# Altium PCB 660-LDBU01-CELLS.PcbDoc
Units mm, origin at the board's own origin, x right, y up, seen from the top; angles counter-clockwise.
Board outline 151.26 x 162.69 mm, 4 copper layers (Top Layer, MidLayer1, MidLayer2, Bottom Layer); 8 components, 0 nets, 6 pads, 0 vias.
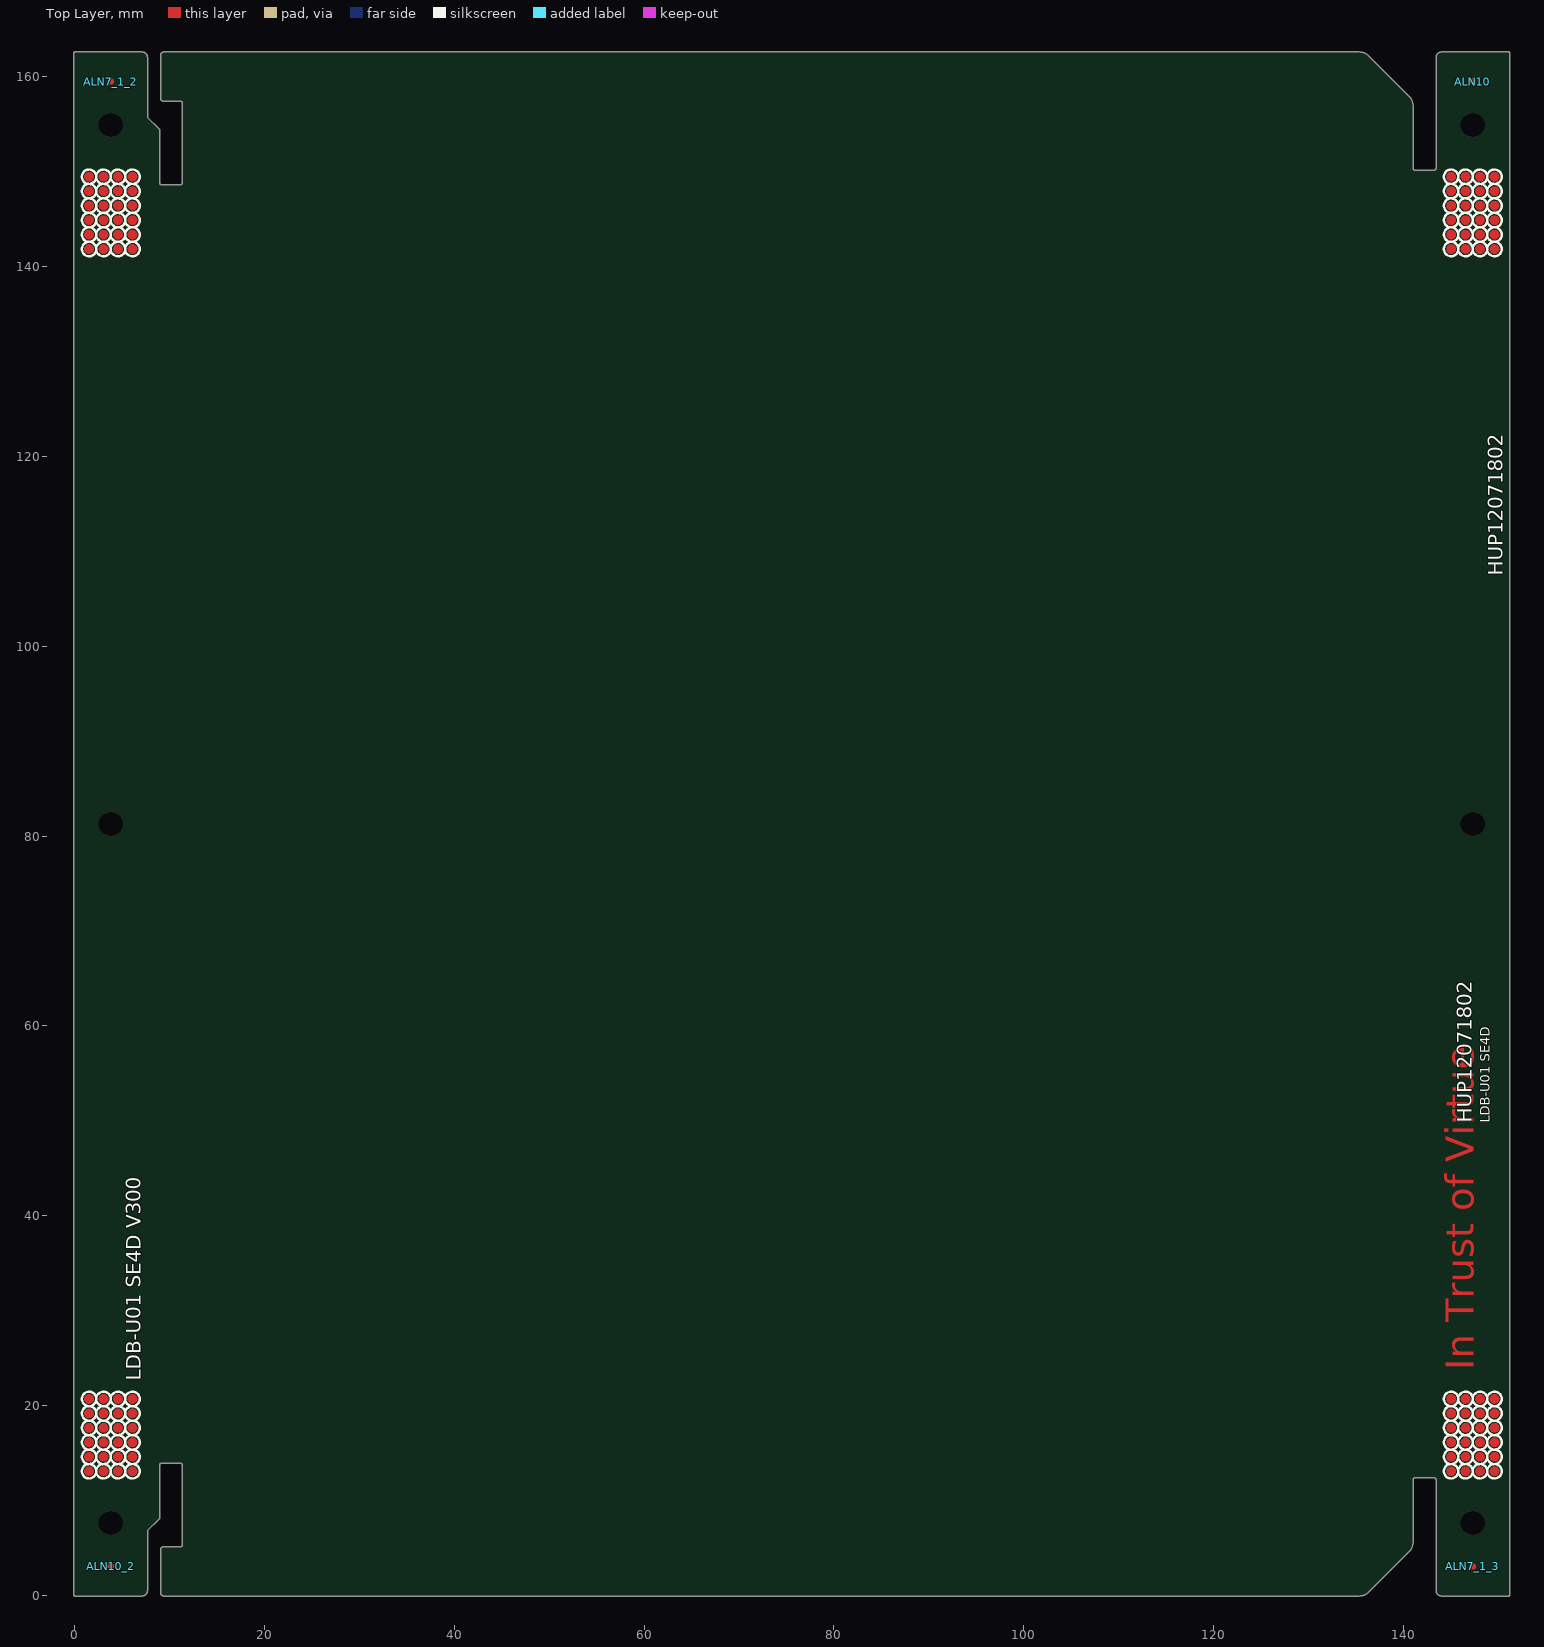
[diagram p0: Top Layer view]
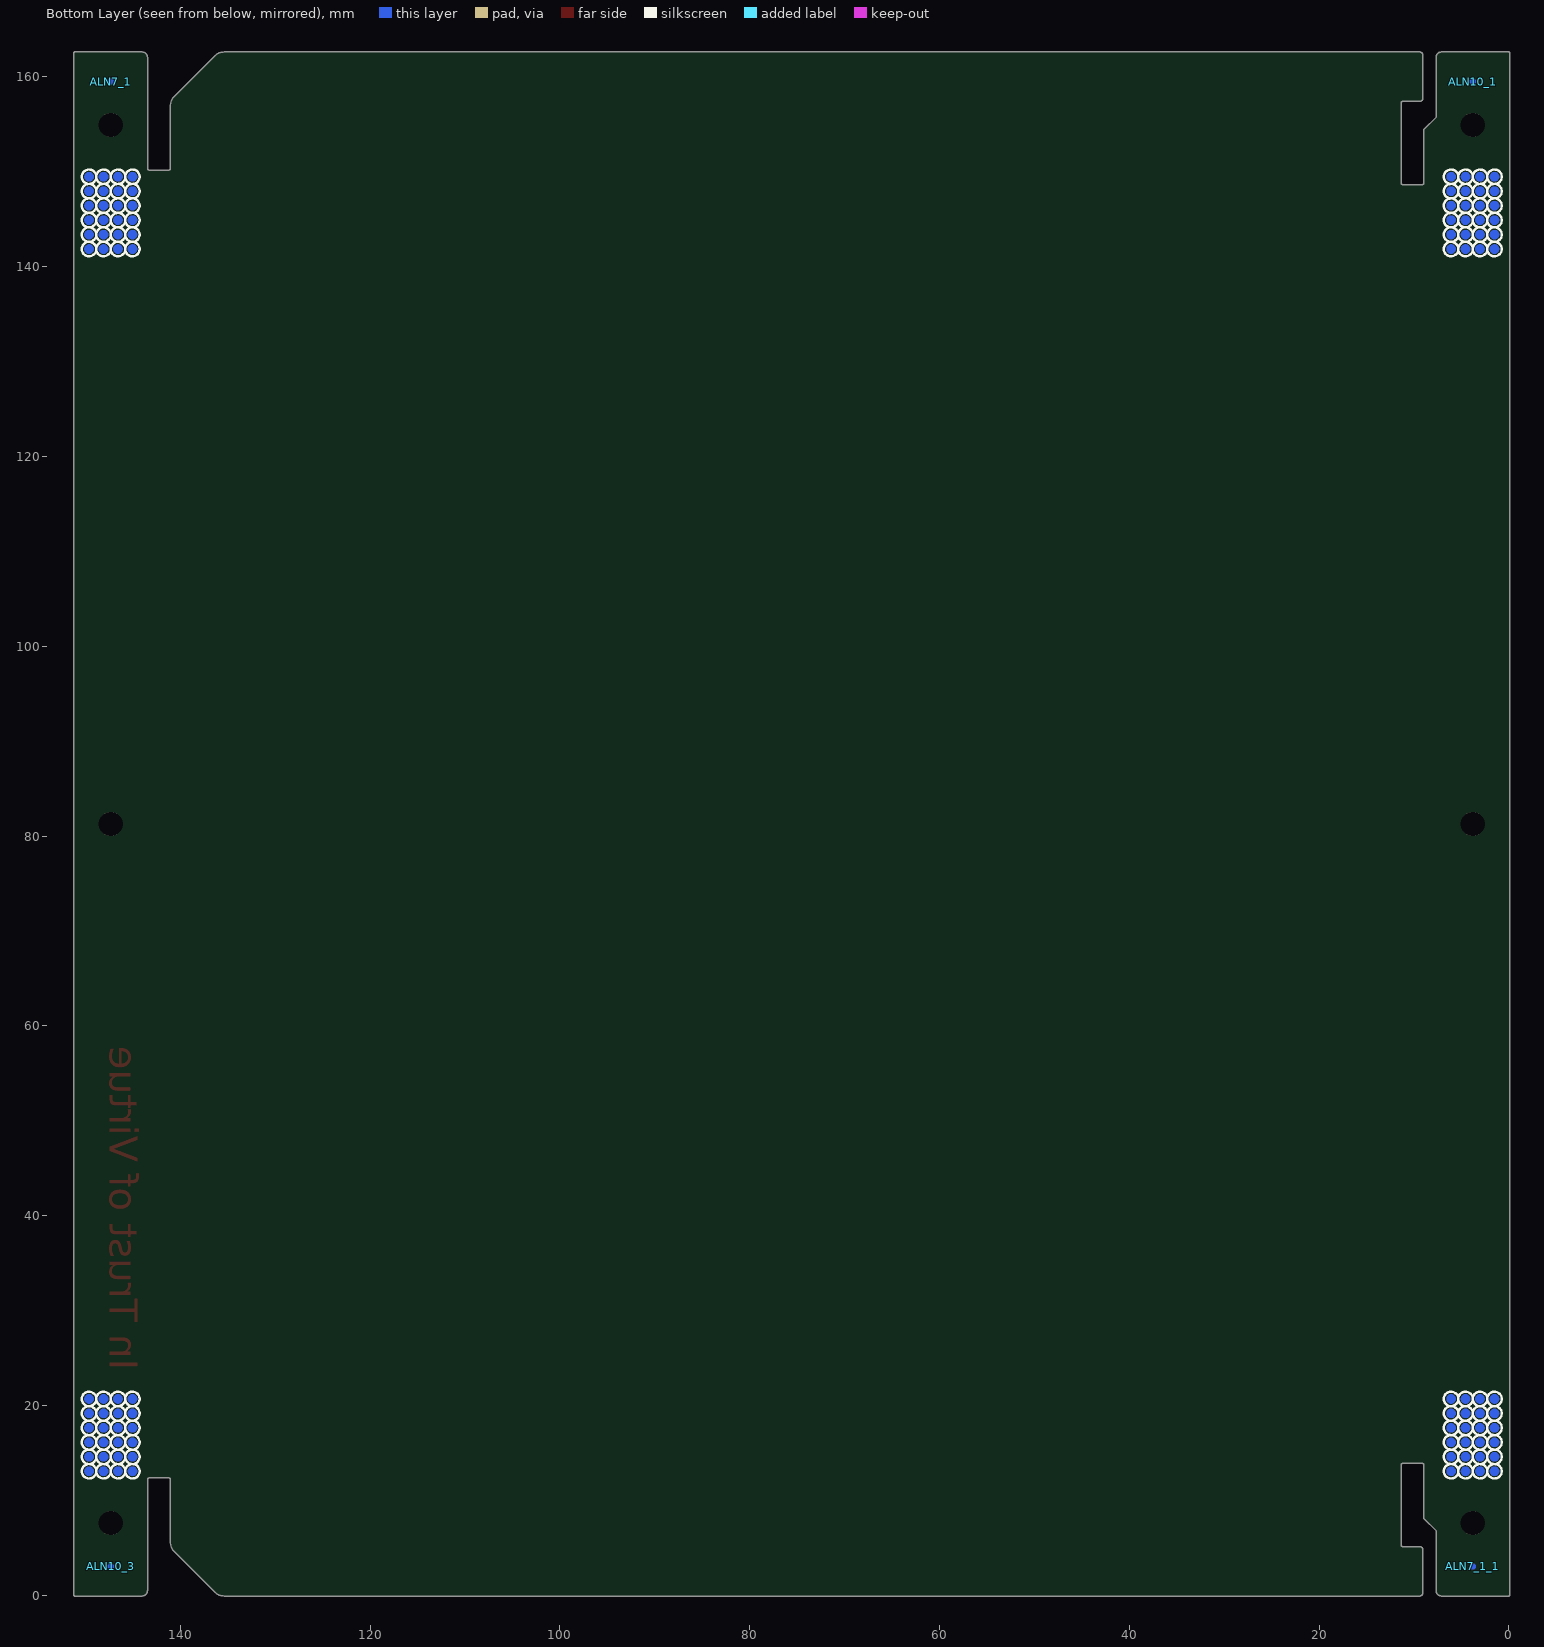
[diagram p1: Bottom Layer view, seen from below]
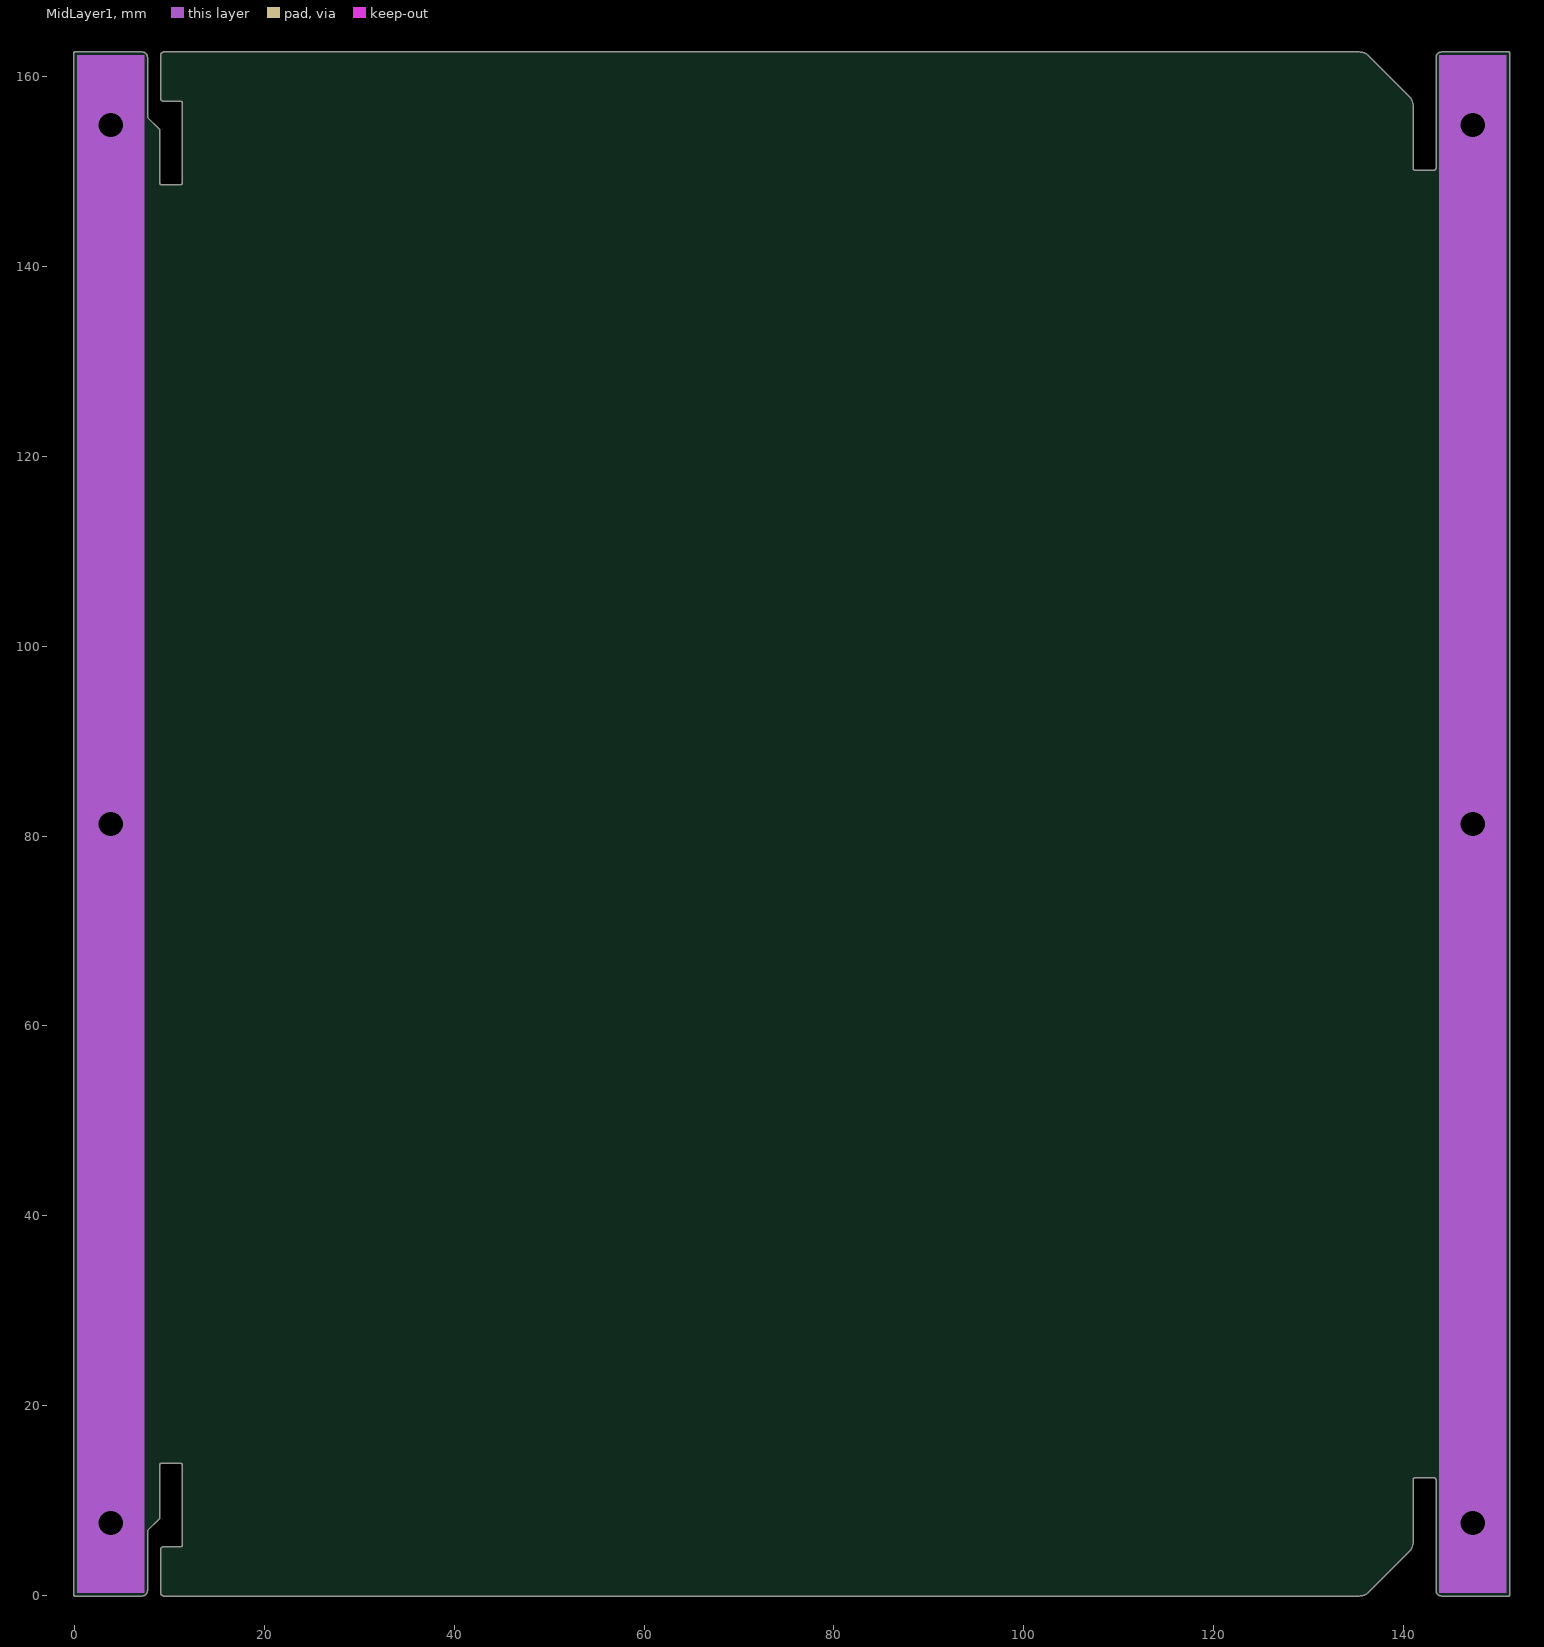
[diagram p2: MidLayer1]
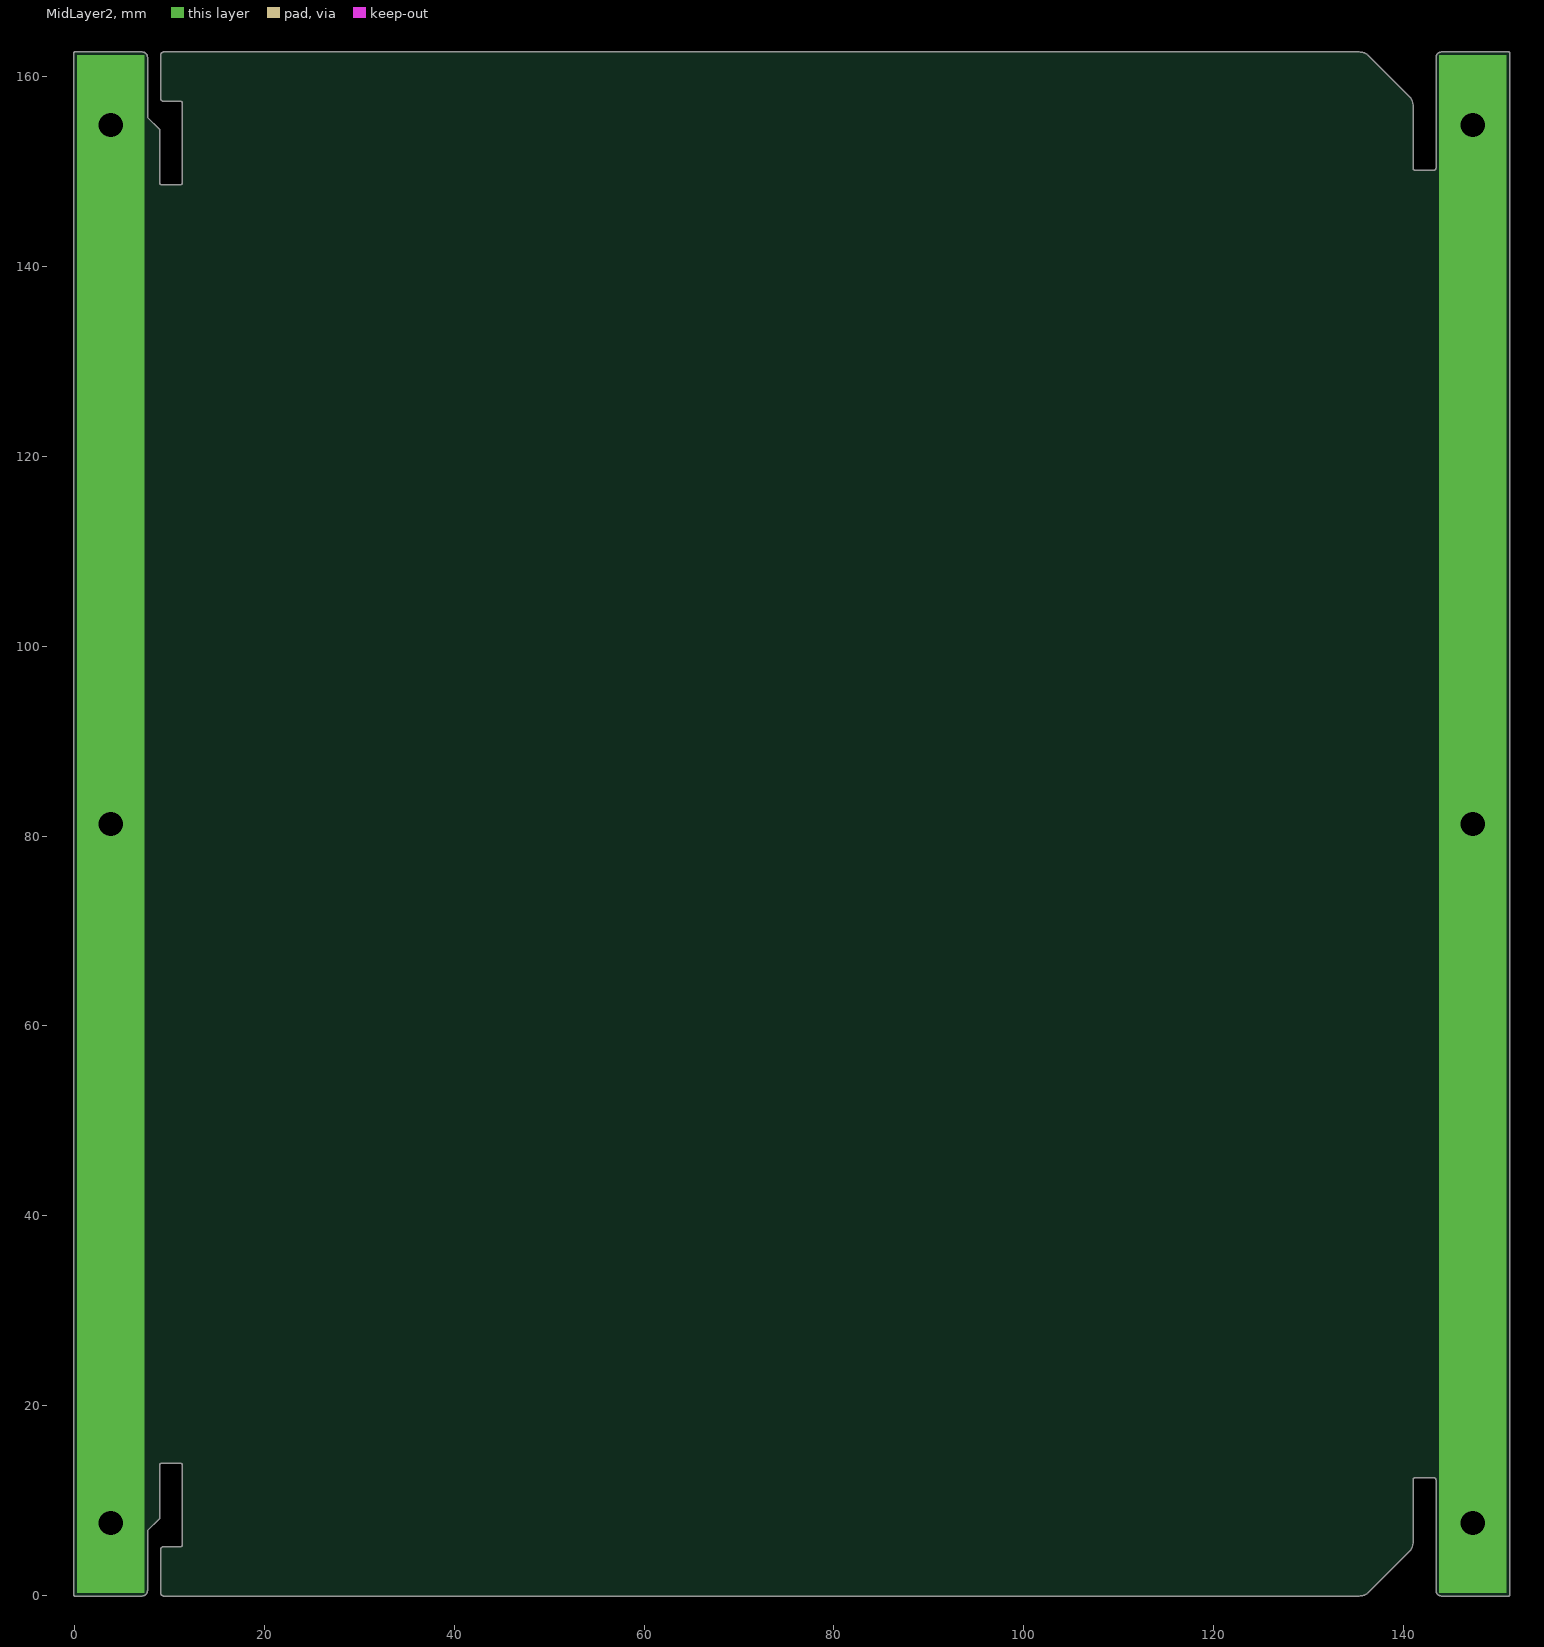
[diagram p3: MidLayer2]

## Layer stack, top to bottom
Top Layer: signal copper 0.0356
Dielectric: core 0.32, FR-4, Dk 4.8
MidLayer1: signal copper 0.0356
Dielectric: prepreg 0.32, FR-4, Dk 4.8
MidLayer2: signal copper 0.0356
Dielectric: core 0.32, FR-4, Dk 4.8
Bottom Layer: signal copper 0.0356

## Board outline
0,-0.064 cw(c0,0) -0.064,0 -0.064,162.56 cw(c0,162.56) 0,162.624 7.12,162.624 cw(c7.12,162.06) 7.684,162.06 cw(c7.62,162.06) 7.684,162.058 7.684,155.728 8.935,154.477 cw(c8.89,154.432) 8.954,154.432 8.954,148.844 ccw(c9.144,148.844) 9.144,148.654 11.176,148.654 ccw(c11.176,148.844) 11.366,148.844 11.366,157.226 ccw(c11.176,157.226) 11.176,157.416 9.398,157.416 cw(c9.398,157.734) 9.08,157.734 9.08,162.306 cw(c9.398,162.306) 9.398,162.624 135.382,162.624 cw(c135.382,161.29) 136.325,162.233 140.643,157.915 cw(c139.7,156.972) 141.034,156.972 141.034,150.368 ccw(c141.224,150.368) 141.224,150.178 143.256,150.178 ccw(c143.256,150.368) 143.446,150.368 143.446,162.052 cw(c144.018,162.052) 143.446,162.058 cw(c143.51,162.06) 143.446,162.064 cw(c144.018,162.052) 144.018,162.624 151.13,162.624 cw(c151.13,162.56) 151.194,162.56 151.194,0 ccw(c151.13,0) 151.194,0.001 151.194,0 cw(c151.13,0) 151.13,-0.064 144.018,-0.064 cw(c144.018,0.508) 143.446,0.508 143.446,12.192 ccw(c143.256,12.192) 143.256,12.382 141.224,12.382 ccw(c141.224,12.192) 141.034,12.192 141.034,5.588 cw(c139.7,5.588) 140.643,4.645 136.325,0.327 cw(c135.382,1.27) 135.382,-0.064 9.398,-0.064 cw(c9.398,0.254) 9.08,0.254 9.08,4.826 cw(c9.398,4.826) 9.398,5.144 11.176,5.144 ccw(c11.176,5.334) 11.366,5.334 11.366,13.716 ccw(c11.176,13.716) 11.176,13.906 9.144,13.906 ccw(c9.144,13.716) 8.954,13.716 8.954,8.128 cw(c8.89,8.128) 8.935,8.083 7.684,6.832 7.684,0.508 cw(c7.112,0.508) 7.112,-0.064

## Design rules (kind name [scope] priority, off if disabled: settings)
Clearance [All] p1: gap=0.254
FabricationTestPointUsage TestPointUsage [All] p1: valid=0 allowmultiple=FALSE
FabricationTestpoint Testpoint [All] p1: side=3 testpointundercomponent=TRUE minsize=1.016 maxsize=2.54 preferedsize=1.524 minholesize=0 maxholesize=1.016 preferedholesize=0.813 testpointgrid=0.025 allowsidetop=TRUE allowsidebottom=TRUE usegrid=TRUE gridtolerance=0
PolygonConnect [All] p1: connectstyle=Relief reliefconductorwidth=0.254 reliefentries=4 polygonreliefangle="90 Angle"
RoutingVias [All] p1: holewidth=0.711 width=1.27 viastyle="Through Hole" minholewidth=0.711 minwidth=1.27 maxholewidth=0.711 maxwidth=12.7
SilkscreenOverComponentPads [All] p1: minsilkscreentomaskgap=0.254
SolderMaskExpansion [All] p1: expansion=0.102
Width [All] p1: maxlimit=2.54 minlimit=0.127 preferedwidth=0.254
25 further rules are at their usual default settings.

## Components (designator, comment, footprint, x,y, rotation, side; value= is the part's Value field where it differs from the comment)
ALN7_1 "Test Point" ALIGN 147.32,159.512 r180 bottom (schematic designator ALN6)
ALN7_1_1 "Test Point" ALIGN 3.81,3.048 r0 bottom (schematic designator ALN6)
ALN7_1_2 "Test Point" ALIGN 3.81,159.512 r0 top (schematic designator ALN6)
ALN7_1_3 "Test Point" ALIGN 147.32,3.048 r180 top (schematic designator ALN6)
ALN10 "Test Point" ALIGN 147.32,159.512 r0 top (schematic designator ALN6)
ALN10_1 "Test Point" ALIGN 3.81,159.512 r180 bottom (schematic designator ALN6)
ALN10_2 "Test Point" ALIGN 3.81,3.048 r180 top (schematic designator ALN6)
ALN10_3 "Test Point" ALIGN 147.32,3.048 r0 bottom (schematic designator ALN6)

## Footprints (in the part's own frame and the unit in brackets; to place one, negate y for a bottom-side part, rotate by r counter-clockwise, add the part's x,y. Pads: shape width x height; smd on the part's side, far side on the other; paste and mask are expansions set on the pad)
ALIGN [mm]
  Top Layer circle w0.406: c0,0 r0.127

## Part data
ALN7_1 ALN7_1_1 ALN7_1_2 ALN7_1_3 ALN10 ALN10_1 ALN10_2 ALN10_3: library part ALIGN

## Free pads (board coordinates)
  round 2.489 hole 2.54: 0(3.81,7.62) 0(3.81,81.28) 0(3.81,154.94) 0(147.32,81.28) 0(147.32,7.62) 0(147.32,154.94)

## Nets (pads, with @x,y where several pads share a name; then routed paths per layer and width w, separated by ;. In a path a pad name is that pad's centre, name@x,y a point inside that pad or via, vN(x,y) a via of type N, cw(c..) or ccw(c..) an arc to the next point about the centre after c; other vN are vias at no path point)
copper on no net: | length 306.4
  Top Layer w0.508: 1.778,13.081 ccw(c1.524,13.081) 1.778,13.081 ; 1.778,14.605 ccw(c1.524,14.605) 1.778,14.605 ; 1.778,16.129 ccw(c1.524,16.129) 1.778,16.129 ; 1.778,17.653 ccw(c1.524,17.653) 1.778,17.653 ; 1.778,19.177 ccw(c1.524,19.177) 1.778,19.177 ; 1.778,20.701 ccw(c1.524,20.701) 1.778,20.701 ; 1.778,141.859 ccw(c1.524,141.859) 1.778,141.859 ; 1.778,143.383 ccw(c1.524,143.383) 1.778,143.383 ; 1.778,144.907 ccw(c1.524,144.907) 1.778,144.907 ; 1.778,146.431 ccw(c1.524,146.431) 1.778,146.431 ; 1.778,147.955 ccw(c1.524,147.955) 1.778,147.955 ; 1.778,149.479 ccw(c1.524,149.479) 1.778,149.479 ; 3.302,13.081 ccw(c3.048,13.081) 3.302,13.081 ; 3.302,14.605 ccw(c3.048,14.605) 3.302,14.605 ; 3.302,16.129 ccw(c3.048,16.129) 3.302,16.129 ; 3.302,17.653 ccw(c3.048,17.653) 3.302,17.653 ; 3.302,19.177 ccw(c3.048,19.177) 3.302,19.177 ; 3.302,20.701 ccw(c3.048,20.701) 3.302,20.701 ; 3.302,141.859 ccw(c3.048,141.859) 3.302,141.859 ; 3.302,143.383 ccw(c3.048,143.383) 3.302,143.383 ; 3.302,144.907 ccw(c3.048,144.907) 3.302,144.907 ; 3.302,146.431 ccw(c3.048,146.431) 3.302,146.431 ; 3.302,147.955 ccw(c3.048,147.955) 3.302,147.955 ; 3.302,149.479 ccw(c3.048,149.479) 3.302,149.479 ; 4.826,13.081 ccw(c4.572,13.081) 4.826,13.081 ; 4.826,14.605 ccw(c4.572,14.605) 4.826,14.605 ; 4.826,16.129 ccw(c4.572,16.129) 4.826,16.129 ; 4.826,17.653 ccw(c4.572,17.653) 4.826,17.653 ; 4.826,19.177 ccw(c4.572,19.177) 4.826,19.177 ; 4.826,20.701 ccw(c4.572,20.701) 4.826,20.701 ; 4.826,141.859 ccw(c4.572,141.859) 4.826,141.859 ; 4.826,143.383 ccw(c4.572,143.383) 4.826,143.383 ; 4.826,144.907 ccw(c4.572,144.907) 4.826,144.907 ; 4.826,146.431 ccw(c4.572,146.431) 4.826,146.431 ; 4.826,147.955 ccw(c4.572,147.955) 4.826,147.955 ; 4.826,149.479 ccw(c4.572,149.479) 4.826,149.479 ; 6.35,13.081 ccw(c6.096,13.081) 6.35,13.081 ; 6.35,14.605 ccw(c6.096,14.605) 6.35,14.605 ; 6.35,16.129 ccw(c6.096,16.129) 6.35,16.129 ; 6.35,17.653 ccw(c6.096,17.653) 6.35,17.653 ; 6.35,19.177 ccw(c6.096,19.177) 6.35,19.177 ; 6.35,20.701 ccw(c6.096,20.701) 6.35,20.701 ; 6.35,141.859 ccw(c6.096,141.859) 6.35,141.859 ; 6.35,143.383 ccw(c6.096,143.383) 6.35,143.383 ; 6.35,144.907 ccw(c6.096,144.907) 6.35,144.907 ; 6.35,146.431 ccw(c6.096,146.431) 6.35,146.431 ; 6.35,147.955 ccw(c6.096,147.955) 6.35,147.955 ; 6.35,149.479 ccw(c6.096,149.479) 6.35,149.479 ; 145.288,13.081 ccw(c145.034,13.081) 145.288,13.081 ; 145.288,14.605 ccw(c145.034,14.605) 145.288,14.605 ; 145.288,16.129 ccw(c145.034,16.129) 145.288,16.129 ; 145.288,17.653 ccw(c145.034,17.653) 145.288,17.653 ; 145.288,19.177 ccw(c145.034,19.177) 145.288,19.177 ; 145.288,20.701 ccw(c145.034,20.701) 145.288,20.701 ; 145.288,141.859 ccw(c145.034,141.859) 145.288,141.859 ; 145.288,143.383 ccw(c145.034,143.383) 145.288,143.383 ; 145.288,144.907 ccw(c145.034,144.907) 145.288,144.907 ; 145.288,146.431 ccw(c145.034,146.431) 145.288,146.431 ; 145.288,147.955 ccw(c145.034,147.955) 145.288,147.955 ; 145.288,149.479 ccw(c145.034,149.479) 145.288,149.479 ; 146.812,13.081 ccw(c146.558,13.081) 146.812,13.081 ; 146.812,14.605 ccw(c146.558,14.605) 146.812,14.605 ; 146.812,16.129 ccw(c146.558,16.129) 146.812,16.129 ; 146.812,17.653 ccw(c146.558,17.653) 146.812,17.653 ; 146.812,19.177 ccw(c146.558,19.177) 146.812,19.177 ; 146.812,20.701 ccw(c146.558,20.701) 146.812,20.701 ; 146.812,141.859 ccw(c146.558,141.859) 146.812,141.859 ; 146.812,143.383 ccw(c146.558,143.383) 146.812,143.383 ; 146.812,144.907 ccw(c146.558,144.907) 146.812,144.907 ; 146.812,146.431 ccw(c146.558,146.431) 146.812,146.431 ; 146.812,147.955 ccw(c146.558,147.955) 146.812,147.955 ; 146.812,149.479 ccw(c146.558,149.479) 146.812,149.479 ; 148.336,13.081 ccw(c148.082,13.081) 148.336,13.081 ; 148.336,14.605 ccw(c148.082,14.605) 148.336,14.605 ; 148.336,16.129 ccw(c148.082,16.129) 148.336,16.129 ; 148.336,17.653 ccw(c148.082,17.653) 148.336,17.653 ; 148.336,19.177 ccw(c148.082,19.177) 148.336,19.177 ; 148.336,20.701 ccw(c148.082,20.701) 148.336,20.701 ; 148.336,141.859 ccw(c148.082,141.859) 148.336,141.859 ; 148.336,143.383 ccw(c148.082,143.383) 148.336,143.383 ; 148.336,144.907 ccw(c148.082,144.907) 148.336,144.907 ; 148.336,146.431 ccw(c148.082,146.431) 148.336,146.431 ; 148.336,147.955 ccw(c148.082,147.955) 148.336,147.955 ; 148.336,149.479 ccw(c148.082,149.479) 148.336,149.479 ; 149.86,13.081 ccw(c149.606,13.081) 149.86,13.081 ; 149.86,14.605 ccw(c149.606,14.605) 149.86,14.605 ; 149.86,16.129 ccw(c149.606,16.129) 149.86,16.129 ; 149.86,17.653 ccw(c149.606,17.653) 149.86,17.653 ; 149.86,19.177 ccw(c149.606,19.177) 149.86,19.177 ; 149.86,20.701 ccw(c149.606,20.701) 149.86,20.701 ; 149.86,141.859 ccw(c149.606,141.859) 149.86,141.859 ; 149.86,143.383 ccw(c149.606,143.383) 149.86,143.383 ; 149.86,144.907 ccw(c149.606,144.907) 149.86,144.907 ; 149.86,146.431 ccw(c149.606,146.431) 149.86,146.431 ; 149.86,147.955 ccw(c149.606,147.955) 149.86,147.955 ; 149.86,149.479 ccw(c149.606,149.479) 149.86,149.479
  Bottom Layer w0.508: 1.778,13.081 ccw(c1.524,13.081) 1.778,13.081 ; 1.778,14.605 ccw(c1.524,14.605) 1.778,14.605 ; 1.778,16.129 ccw(c1.524,16.129) 1.778,16.129 ; 1.778,17.653 ccw(c1.524,17.653) 1.778,17.653 ; 1.778,19.177 ccw(c1.524,19.177) 1.778,19.177 ; 1.778,20.701 ccw(c1.524,20.701) 1.778,20.701 ; 1.778,141.859 ccw(c1.524,141.859) 1.778,141.859 ; 1.778,143.383 ccw(c1.524,143.383) 1.778,143.383 ; 1.778,144.907 ccw(c1.524,144.907) 1.778,144.907 ; 1.778,146.431 ccw(c1.524,146.431) 1.778,146.431 ; 1.778,147.955 ccw(c1.524,147.955) 1.778,147.955 ; 1.778,149.479 ccw(c1.524,149.479) 1.778,149.479 ; 3.302,13.081 ccw(c3.048,13.081) 3.302,13.081 ; 3.302,14.605 ccw(c3.048,14.605) 3.302,14.605 ; 3.302,16.129 ccw(c3.048,16.129) 3.302,16.129 ; 3.302,17.653 ccw(c3.048,17.653) 3.302,17.653 ; 3.302,19.177 ccw(c3.048,19.177) 3.302,19.177 ; 3.302,20.701 ccw(c3.048,20.701) 3.302,20.701 ; 3.302,141.859 ccw(c3.048,141.859) 3.302,141.859 ; 3.302,143.383 ccw(c3.048,143.383) 3.302,143.383 ; 3.302,144.907 ccw(c3.048,144.907) 3.302,144.907 ; 3.302,146.431 ccw(c3.048,146.431) 3.302,146.431 ; 3.302,147.955 ccw(c3.048,147.955) 3.302,147.955 ; 3.302,149.479 ccw(c3.048,149.479) 3.302,149.479 ; 4.826,13.081 ccw(c4.572,13.081) 4.826,13.081 ; 4.826,14.605 ccw(c4.572,14.605) 4.826,14.605 ; 4.826,16.129 ccw(c4.572,16.129) 4.826,16.129 ; 4.826,17.653 ccw(c4.572,17.653) 4.826,17.653 ; 4.826,19.177 ccw(c4.572,19.177) 4.826,19.177 ; 4.826,20.701 ccw(c4.572,20.701) 4.826,20.701 ; 4.826,141.859 ccw(c4.572,141.859) 4.826,141.859 ; 4.826,143.383 ccw(c4.572,143.383) 4.826,143.383 ; 4.826,144.907 ccw(c4.572,144.907) 4.826,144.907 ; 4.826,146.431 ccw(c4.572,146.431) 4.826,146.431 ; 4.826,147.955 ccw(c4.572,147.955) 4.826,147.955 ; 4.826,149.479 ccw(c4.572,149.479) 4.826,149.479 ; 6.35,13.081 ccw(c6.096,13.081) 6.35,13.081 ; 6.35,14.605 ccw(c6.096,14.605) 6.35,14.605 ; 6.35,16.129 ccw(c6.096,16.129) 6.35,16.129 ; 6.35,17.653 ccw(c6.096,17.653) 6.35,17.653 ; 6.35,19.177 ccw(c6.096,19.177) 6.35,19.177 ; 6.35,20.701 ccw(c6.096,20.701) 6.35,20.701 ; 6.35,141.859 ccw(c6.096,141.859) 6.35,141.859 ; 6.35,143.383 ccw(c6.096,143.383) 6.35,143.383 ; 6.35,144.907 ccw(c6.096,144.907) 6.35,144.907 ; 6.35,146.431 ccw(c6.096,146.431) 6.35,146.431 ; 6.35,147.955 ccw(c6.096,147.955) 6.35,147.955 ; 6.35,149.479 ccw(c6.096,149.479) 6.35,149.479 ; 145.288,13.081 ccw(c145.034,13.081) 145.288,13.081 ; 145.288,14.605 ccw(c145.034,14.605) 145.288,14.605 ; 145.288,16.129 ccw(c145.034,16.129) 145.288,16.129 ; 145.288,17.653 ccw(c145.034,17.653) 145.288,17.653 ; 145.288,19.177 ccw(c145.034,19.177) 145.288,19.177 ; 145.288,20.701 ccw(c145.034,20.701) 145.288,20.701 ; 145.288,141.859 ccw(c145.034,141.859) 145.288,141.859 ; 145.288,143.383 ccw(c145.034,143.383) 145.288,143.383 ; 145.288,144.907 ccw(c145.034,144.907) 145.288,144.907 ; 145.288,146.431 ccw(c145.034,146.431) 145.288,146.431 ; 145.288,147.955 ccw(c145.034,147.955) 145.288,147.955 ; 145.288,149.479 ccw(c145.034,149.479) 145.288,149.479 ; 146.812,13.081 ccw(c146.558,13.081) 146.812,13.081 ; 146.812,14.605 ccw(c146.558,14.605) 146.812,14.605 ; 146.812,16.129 ccw(c146.558,16.129) 146.812,16.129 ; 146.812,17.653 ccw(c146.558,17.653) 146.812,17.653 ; 146.812,19.177 ccw(c146.558,19.177) 146.812,19.177 ; 146.812,20.701 ccw(c146.558,20.701) 146.812,20.701 ; 146.812,141.859 ccw(c146.558,141.859) 146.812,141.859 ; 146.812,143.383 ccw(c146.558,143.383) 146.812,143.383 ; 146.812,144.907 ccw(c146.558,144.907) 146.812,144.907 ; 146.812,146.431 ccw(c146.558,146.431) 146.812,146.431 ; 146.812,147.955 ccw(c146.558,147.955) 146.812,147.955 ; 146.812,149.479 ccw(c146.558,149.479) 146.812,149.479 ; 148.336,13.081 ccw(c148.082,13.081) 148.336,13.081 ; 148.336,14.605 ccw(c148.082,14.605) 148.336,14.605 ; 148.336,16.129 ccw(c148.082,16.129) 148.336,16.129 ; 148.336,17.653 ccw(c148.082,17.653) 148.336,17.653 ; 148.336,19.177 ccw(c148.082,19.177) 148.336,19.177 ; 148.336,20.701 ccw(c148.082,20.701) 148.336,20.701 ; 148.336,141.859 ccw(c148.082,141.859) 148.336,141.859 ; 148.336,143.383 ccw(c148.082,143.383) 148.336,143.383 ; 148.336,144.907 ccw(c148.082,144.907) 148.336,144.907 ; 148.336,146.431 ccw(c148.082,146.431) 148.336,146.431 ; 148.336,147.955 ccw(c148.082,147.955) 148.336,147.955 ; 148.336,149.479 ccw(c148.082,149.479) 148.336,149.479 ; 149.86,13.081 ccw(c149.606,13.081) 149.86,13.081 ; 149.86,14.605 ccw(c149.606,14.605) 149.86,14.605 ; 149.86,16.129 ccw(c149.606,16.129) 149.86,16.129 ; 149.86,17.653 ccw(c149.606,17.653) 149.86,17.653 ; 149.86,19.177 ccw(c149.606,19.177) 149.86,19.177 ; 149.86,20.701 ccw(c149.606,20.701) 149.86,20.701 ; 149.86,141.859 ccw(c149.606,141.859) 149.86,141.859 ; 149.86,143.383 ccw(c149.606,143.383) 149.86,143.383 ; 149.86,144.907 ccw(c149.606,144.907) 149.86,144.907 ; 149.86,146.431 ccw(c149.606,146.431) 149.86,146.431 ; 149.86,147.955 ccw(c149.606,147.955) 149.86,147.955 ; 149.86,149.479 ccw(c149.606,149.479) 149.86,149.479

## Other copper
Top Layer:
  text "In Trust of Virtue" at 148.435,23.699 h5.08 r90
MidLayer1:
  rectangle: 0.254,0.254 7.366,162.306
  region: 150.876,162.306 143.764,162.306 143.764,0.254 150.876,0.254
MidLayer2:
  rectangle: 0.254,0.254 7.366,162.306
  region: 150.876,162.306 143.764,162.306 143.764,0.254 150.876,0.254

## Silkscreen, mask and mechanical layers (free items; w line width, h text height)
Top Overlay:
  circle w0.254: c145.034,143.383 r0.762
  circle w0.254: c145.034,141.859 r0.762
  circle w0.254: c145.034,146.431 r0.762
  circle w0.254: c145.034,144.907 r0.762
  circle w0.254: c145.034,149.479 r0.762
  circle w0.254: c145.034,147.955 r0.762
  circle w0.254: c146.558,141.859 r0.762
  circle w0.254: c146.558,143.383 r0.762
  circle w0.254: c146.558,147.955 r0.762
  circle w0.254: c146.558,149.479 r0.762
  circle w0.254: c146.558,144.907 r0.762
  circle w0.254: c146.558,146.431 r0.762
  circle w0.254: c148.082,141.859 r0.762
  circle w0.254: c149.606,141.859 r0.762
  circle w0.254: c149.606,143.383 r0.762
  circle w0.254: c148.082,143.383 r0.762
  circle w0.254: c148.082,147.955 r0.762
  circle w0.254: c149.606,147.955 r0.762
  circle w0.254: c149.606,149.479 r0.762
  circle w0.254: c148.082,149.479 r0.762
  circle w0.254: c148.082,144.907 r0.762
  circle w0.254: c149.606,144.907 r0.762
  circle w0.254: c149.606,146.431 r0.762
  circle w0.254: c148.082,146.431 r0.762
  circle w0.254: c3.048,16.129 r0.762
  circle w0.254: c1.524,16.129 r0.762
  circle w0.254: c1.524,17.653 r0.762
  circle w0.254: c3.048,17.653 r0.762
  circle w0.254: c3.048,13.081 r0.762
  circle w0.254: c1.524,13.081 r0.762
  circle w0.254: c1.524,14.605 r0.762
  circle w0.254: c3.048,14.605 r0.762
  circle w0.254: c3.048,19.177 r0.762
  circle w0.254: c1.524,19.177 r0.762
  circle w0.254: c1.524,20.701 r0.762
  circle w0.254: c3.048,20.701 r0.762
  circle w0.254: c4.572,16.129 r0.762
  circle w0.254: c4.572,17.653 r0.762
  circle w0.254: c4.572,13.081 r0.762
  circle w0.254: c4.572,14.605 r0.762
  circle w0.254: c4.572,19.177 r0.762
  circle w0.254: c4.572,20.701 r0.762
  circle w0.254: c6.096,14.605 r0.762
  circle w0.254: c6.096,13.081 r0.762
  circle w0.254: c6.096,17.653 r0.762
  circle w0.254: c6.096,16.129 r0.762
  circle w0.254: c6.096,20.701 r0.762
  circle w0.254: c6.096,19.177 r0.762
  circle w0.254: c1.524,143.383 r0.762
  circle w0.254: c1.524,141.859 r0.762
  circle w0.254: c1.524,146.431 r0.762
  circle w0.254: c1.524,144.907 r0.762
  circle w0.254: c1.524,149.479 r0.762
  circle w0.254: c1.524,147.955 r0.762
  circle w0.254: c3.048,141.859 r0.762
  circle w0.254: c3.048,143.383 r0.762
  circle w0.254: c3.048,147.955 r0.762
  circle w0.254: c3.048,149.479 r0.762
  circle w0.254: c3.048,144.907 r0.762
  circle w0.254: c3.048,146.431 r0.762
  circle w0.254: c4.572,141.859 r0.762
  circle w0.254: c6.096,141.859 r0.762
  circle w0.254: c6.096,143.383 r0.762
  circle w0.254: c4.572,143.383 r0.762
  circle w0.254: c4.572,147.955 r0.762
  circle w0.254: c6.096,147.955 r0.762
  circle w0.254: c6.096,149.479 r0.762
  circle w0.254: c4.572,149.479 r0.762
  circle w0.254: c4.572,144.907 r0.762
  circle w0.254: c6.096,144.907 r0.762
  circle w0.254: c6.096,146.431 r0.762
  circle w0.254: c4.572,146.431 r0.762
  circle w0.254: c149.606,19.177 r0.762
  circle w0.254: c149.606,20.701 r0.762
  circle w0.254: c149.606,16.129 r0.762
  circle w0.254: c149.606,17.653 r0.762
  circle w0.254: c149.606,13.081 r0.762
  circle w0.254: c149.606,14.605 r0.762
  circle w0.254: c148.082,20.701 r0.762
  circle w0.254: c148.082,19.177 r0.762
  circle w0.254: c148.082,14.605 r0.762
  circle w0.254: c148.082,13.081 r0.762
  circle w0.254: c148.082,17.653 r0.762
  circle w0.254: c148.082,16.129 r0.762
  circle w0.254: c146.558,20.701 r0.762
  circle w0.254: c145.034,20.701 r0.762
  circle w0.254: c145.034,19.177 r0.762
  circle w0.254: c146.558,19.177 r0.762
  circle w0.254: c146.558,14.605 r0.762
  circle w0.254: c145.034,14.605 r0.762
  circle w0.254: c145.034,13.081 r0.762
  circle w0.254: c146.558,13.081 r0.762
  circle w0.254: c146.558,17.653 r0.762
  circle w0.254: c145.034,17.653 r0.762
  circle w0.254: c145.034,16.129 r0.762
  circle w0.254: c146.558,16.129 r0.762
  text "HUP12071802" at 150.495,107.442 h1.52 r90
  text "HUP12071802" at 147.193,49.784 h1.52 r90
  text "LDB-U01 SE4D" at 149.098,49.784 h1.02 r90
  text "LDB-U01 SE4D V300" at 6.985,22.606 h1.52 r90
Bottom Overlay:
  circle w0.254: c146.558,146.431 r0.762
  circle w0.254: c145.034,146.431 r0.762
  circle w0.254: c145.034,144.907 r0.762
  circle w0.254: c146.558,144.907 r0.762
  circle w0.254: c146.558,149.479 r0.762
  circle w0.254: c145.034,149.479 r0.762
  circle w0.254: c145.034,147.955 r0.762
  circle w0.254: c146.558,147.955 r0.762
  circle w0.254: c146.558,143.383 r0.762
  circle w0.254: c145.034,143.383 r0.762
  circle w0.254: c145.034,141.859 r0.762
  circle w0.254: c146.558,141.859 r0.762
  circle w0.254: c148.082,146.431 r0.762
  circle w0.254: c148.082,144.907 r0.762
  circle w0.254: c148.082,149.479 r0.762
  circle w0.254: c148.082,147.955 r0.762
  circle w0.254: c148.082,143.383 r0.762
  circle w0.254: c148.082,141.859 r0.762
  circle w0.254: c149.606,147.955 r0.762
  circle w0.254: c149.606,149.479 r0.762
  circle w0.254: c149.606,144.907 r0.762
  circle w0.254: c149.606,146.431 r0.762
  circle w0.254: c149.606,141.859 r0.762
  circle w0.254: c149.606,143.383 r0.762
  circle w0.254: c1.524,19.177 r0.762
  circle w0.254: c1.524,20.701 r0.762
  circle w0.254: c1.524,16.129 r0.762
  circle w0.254: c1.524,17.653 r0.762
  circle w0.254: c1.524,13.081 r0.762
  circle w0.254: c1.524,14.605 r0.762
  circle w0.254: c3.048,20.701 r0.762
  circle w0.254: c3.048,19.177 r0.762
  circle w0.254: c3.048,14.605 r0.762
  circle w0.254: c3.048,13.081 r0.762
  circle w0.254: c3.048,17.653 r0.762
  circle w0.254: c3.048,16.129 r0.762
  circle w0.254: c4.572,20.701 r0.762
  circle w0.254: c6.096,20.701 r0.762
  circle w0.254: c6.096,19.177 r0.762
  circle w0.254: c4.572,19.177 r0.762
  circle w0.254: c4.572,14.605 r0.762
  circle w0.254: c6.096,14.605 r0.762
  circle w0.254: c6.096,13.081 r0.762
  circle w0.254: c4.572,13.081 r0.762
  circle w0.254: c4.572,17.653 r0.762
  circle w0.254: c6.096,17.653 r0.762
  circle w0.254: c6.096,16.129 r0.762
  circle w0.254: c4.572,16.129 r0.762
  circle w0.254: c3.048,146.431 r0.762
  circle w0.254: c1.524,146.431 r0.762
  circle w0.254: c1.524,144.907 r0.762
  circle w0.254: c3.048,144.907 r0.762
  circle w0.254: c3.048,149.479 r0.762
  circle w0.254: c1.524,149.479 r0.762
  circle w0.254: c1.524,147.955 r0.762
  circle w0.254: c3.048,147.955 r0.762
  circle w0.254: c3.048,143.383 r0.762
  circle w0.254: c1.524,143.383 r0.762
  circle w0.254: c1.524,141.859 r0.762
  circle w0.254: c3.048,141.859 r0.762
  circle w0.254: c4.572,146.431 r0.762
  circle w0.254: c4.572,144.907 r0.762
  circle w0.254: c4.572,149.479 r0.762
  circle w0.254: c4.572,147.955 r0.762
  circle w0.254: c4.572,143.383 r0.762
  circle w0.254: c4.572,141.859 r0.762
  circle w0.254: c6.096,147.955 r0.762
  circle w0.254: c6.096,149.479 r0.762
  circle w0.254: c6.096,144.907 r0.762
  circle w0.254: c6.096,146.431 r0.762
  circle w0.254: c6.096,141.859 r0.762
  circle w0.254: c6.096,143.383 r0.762
  circle w0.254: c148.082,16.129 r0.762
  circle w0.254: c149.606,16.129 r0.762
  circle w0.254: c149.606,17.653 r0.762
  circle w0.254: c148.082,17.653 r0.762
  circle w0.254: c148.082,13.081 r0.762
  circle w0.254: c149.606,13.081 r0.762
  circle w0.254: c149.606,14.605 r0.762
  circle w0.254: c148.082,14.605 r0.762
  circle w0.254: c148.082,19.177 r0.762
  circle w0.254: c149.606,19.177 r0.762
  circle w0.254: c149.606,20.701 r0.762
  circle w0.254: c148.082,20.701 r0.762
  circle w0.254: c146.558,16.129 r0.762
  circle w0.254: c146.558,17.653 r0.762
  circle w0.254: c146.558,13.081 r0.762
  circle w0.254: c146.558,14.605 r0.762
  circle w0.254: c146.558,19.177 r0.762
  circle w0.254: c146.558,20.701 r0.762
  circle w0.254: c145.034,14.605 r0.762
  circle w0.254: c145.034,13.081 r0.762
  circle w0.254: c145.034,17.653 r0.762
  circle w0.254: c145.034,16.129 r0.762
  circle w0.254: c145.034,20.701 r0.762
  circle w0.254: c145.034,19.177 r0.762
Top Solder:
  circle w0.61: c145.034,141.859 r0.254
  circle w0.61: c146.558,141.859 r0.254
  circle w0.61: c146.558,143.383 r0.254
  circle w0.61: c145.034,143.383 r0.254
  circle w0.61: c145.034,147.955 r0.254
  circle w0.61: c146.558,147.955 r0.254
  circle w0.61: c146.558,149.479 r0.254
  circle w0.61: c145.034,149.479 r0.254
  circle w0.61: c145.034,144.907 r0.254
  circle w0.61: c146.558,144.907 r0.254
  circle w0.61: c146.558,146.431 r0.254
  circle w0.61: c145.034,146.431 r0.254
  circle w0.61: c148.082,141.859 r0.254
  circle w0.61: c149.606,141.859 r0.254
  circle w0.61: c149.606,143.383 r0.254
  circle w0.61: c148.082,143.383 r0.254
  circle w0.61: c148.082,147.955 r0.254
  circle w0.61: c149.606,147.955 r0.254
  circle w0.61: c149.606,149.479 r0.254
  circle w0.61: c148.082,149.479 r0.254
  circle w0.61: c148.082,144.907 r0.254
  circle w0.61: c149.606,144.907 r0.254
  circle w0.61: c149.606,146.431 r0.254
  circle w0.61: c148.082,146.431 r0.254
  circle w0.61: c3.048,16.129 r0.254
  circle w0.61: c1.524,16.129 r0.254
  circle w0.61: c1.524,17.653 r0.254
  circle w0.61: c3.048,17.653 r0.254
  circle w0.61: c3.048,13.081 r0.254
  circle w0.61: c1.524,13.081 r0.254
  circle w0.61: c1.524,14.605 r0.254
  circle w0.61: c3.048,14.605 r0.254
  circle w0.61: c3.048,19.177 r0.254
  circle w0.61: c1.524,19.177 r0.254
  circle w0.61: c1.524,20.701 r0.254
  circle w0.61: c3.048,20.701 r0.254
  circle w0.61: c6.096,16.129 r0.254
  circle w0.61: c4.572,16.129 r0.254
  circle w0.61: c4.572,17.653 r0.254
  circle w0.61: c6.096,17.653 r0.254
  circle w0.61: c6.096,13.081 r0.254
  circle w0.61: c4.572,13.081 r0.254
  circle w0.61: c4.572,14.605 r0.254
  circle w0.61: c6.096,14.605 r0.254
  circle w0.61: c6.096,19.177 r0.254
  circle w0.61: c4.572,19.177 r0.254
  circle w0.61: c4.572,20.701 r0.254
  circle w0.61: c6.096,20.701 r0.254
  circle w0.61: c1.524,141.859 r0.254
  circle w0.61: c3.048,141.859 r0.254
  circle w0.61: c3.048,143.383 r0.254
  circle w0.61: c1.524,143.383 r0.254
  circle w0.61: c1.524,147.955 r0.254
  circle w0.61: c3.048,147.955 r0.254
  circle w0.61: c3.048,149.479 r0.254
  circle w0.61: c1.524,149.479 r0.254
  circle w0.61: c1.524,144.907 r0.254
  circle w0.61: c3.048,144.907 r0.254
  circle w0.61: c3.048,146.431 r0.254
  circle w0.61: c1.524,146.431 r0.254
  circle w0.61: c4.572,141.859 r0.254
  circle w0.61: c6.096,141.859 r0.254
  circle w0.61: c6.096,143.383 r0.254
  circle w0.61: c4.572,143.383 r0.254
  circle w0.61: c4.572,147.955 r0.254
  circle w0.61: c6.096,147.955 r0.254
  circle w0.61: c6.096,149.479 r0.254
  circle w0.61: c4.572,149.479 r0.254
  circle w0.61: c4.572,144.907 r0.254
  circle w0.61: c6.096,144.907 r0.254
  circle w0.61: c6.096,146.431 r0.254
  circle w0.61: c4.572,146.431 r0.254
  circle w0.61: c149.606,20.701 r0.254
  circle w0.61: c148.082,20.701 r0.254
  circle w0.61: c148.082,19.177 r0.254
  circle w0.61: c149.606,19.177 r0.254
  circle w0.61: c149.606,14.605 r0.254
  circle w0.61: c148.082,14.605 r0.254
  circle w0.61: c148.082,13.081 r0.254
  circle w0.61: c149.606,13.081 r0.254
  circle w0.61: c149.606,17.653 r0.254
  circle w0.61: c148.082,17.653 r0.254
  circle w0.61: c148.082,16.129 r0.254
  circle w0.61: c149.606,16.129 r0.254
  circle w0.61: c146.558,20.701 r0.254
  circle w0.61: c145.034,20.701 r0.254
  circle w0.61: c145.034,19.177 r0.254
  circle w0.61: c146.558,19.177 r0.254
  circle w0.61: c146.558,14.605 r0.254
  circle w0.61: c145.034,14.605 r0.254
  circle w0.61: c145.034,13.081 r0.254
  circle w0.61: c146.558,13.081 r0.254
  circle w0.61: c146.558,17.653 r0.254
  circle w0.61: c145.034,17.653 r0.254
  circle w0.61: c145.034,16.129 r0.254
  circle w0.61: c146.558,16.129 r0.254
  lines w0.508: 8.89,13.97 8.89,16.51 ; 8.89,38.735 8.89,41.275 ; 8.89,63.5 8.89,66.04 ; 8.89,96.52 8.89,99.06 ; 8.89,121.285 8.89,123.825 ; 8.89,146.05 8.89,148.59 ; 11.43,13.97 11.43,16.51 ; 11.43,38.735 11.43,41.275 ; 11.43,63.5 11.43,66.04 ; 11.43,96.52 11.43,99.06 ; 11.43,121.285 11.43,123.825 ; 11.43,146.05 11.43,148.59 ; 30.48,80.01 33.02,80.01 ; 30.48,82.55 33.02,82.55 ; 71.12,80.01 73.66,80.01 ; 71.12,82.55 73.66,82.55 ; 114.3,80.01 116.84,80.01 ; 114.3,82.55 116.84,82.55 ; 140.97,12.446 140.97,14.986 ; 140.97,38.735 140.97,41.275 ; 140.97,65.024 140.97,67.564 ; 140.97,94.996 140.97,97.536 ; 140.97,121.285 140.97,123.825 ; 140.97,147.574 140.97,150.114 ; 143.51,12.446 143.51,14.986 ; 143.51,38.735 143.51,41.275 ; 143.51,65.024 143.51,67.564 ; 143.51,94.996 143.51,97.536 ; 143.51,121.285 143.51,123.825 ; 143.51,147.574 143.51,150.114
  text "In Trust of Virtue" at 148.435,23.699 h5.08 r90
Bottom Solder:
  circle w0.61: c146.558,146.431 r0.254
  circle w0.61: c145.034,146.431 r0.254
  circle w0.61: c145.034,144.907 r0.254
  circle w0.61: c146.558,144.907 r0.254
  circle w0.61: c146.558,149.479 r0.254
  circle w0.61: c145.034,149.479 r0.254
  circle w0.61: c145.034,147.955 r0.254
  circle w0.61: c146.558,147.955 r0.254
  circle w0.61: c146.558,143.383 r0.254
  circle w0.61: c145.034,143.383 r0.254
  circle w0.61: c145.034,141.859 r0.254
  circle w0.61: c146.558,141.859 r0.254
  circle w0.61: c149.606,146.431 r0.254
  circle w0.61: c148.082,146.431 r0.254
  circle w0.61: c148.082,144.907 r0.254
  circle w0.61: c149.606,144.907 r0.254
  circle w0.61: c149.606,149.479 r0.254
  circle w0.61: c148.082,149.479 r0.254
  circle w0.61: c148.082,147.955 r0.254
  circle w0.61: c149.606,147.955 r0.254
  circle w0.61: c149.606,143.383 r0.254
  circle w0.61: c148.082,143.383 r0.254
  circle w0.61: c148.082,141.859 r0.254
  circle w0.61: c149.606,141.859 r0.254
  circle w0.61: c1.524,20.701 r0.254
  circle w0.61: c3.048,20.701 r0.254
  circle w0.61: c3.048,19.177 r0.254
  circle w0.61: c1.524,19.177 r0.254
  circle w0.61: c1.524,14.605 r0.254
  circle w0.61: c3.048,14.605 r0.254
  circle w0.61: c3.048,13.081 r0.254
  circle w0.61: c1.524,13.081 r0.254
  circle w0.61: c1.524,17.653 r0.254
  circle w0.61: c3.048,17.653 r0.254
  circle w0.61: c3.048,16.129 r0.254
  circle w0.61: c1.524,16.129 r0.254
  circle w0.61: c4.572,20.701 r0.254
  circle w0.61: c6.096,20.701 r0.254
  circle w0.61: c6.096,19.177 r0.254
  circle w0.61: c4.572,19.177 r0.254
  circle w0.61: c4.572,14.605 r0.254
  circle w0.61: c6.096,14.605 r0.254
  circle w0.61: c6.096,13.081 r0.254
  circle w0.61: c4.572,13.081 r0.254
  circle w0.61: c4.572,17.653 r0.254
  circle w0.61: c6.096,17.653 r0.254
  circle w0.61: c6.096,16.129 r0.254
  circle w0.61: c4.572,16.129 r0.254
  circle w0.61: c3.048,146.431 r0.254
  circle w0.61: c1.524,146.431 r0.254
  circle w0.61: c1.524,144.907 r0.254
  circle w0.61: c3.048,144.907 r0.254
  circle w0.61: c3.048,149.479 r0.254
  circle w0.61: c1.524,149.479 r0.254
  circle w0.61: c1.524,147.955 r0.254
  circle w0.61: c3.048,147.955 r0.254
  circle w0.61: c3.048,143.383 r0.254
  circle w0.61: c1.524,143.383 r0.254
  circle w0.61: c1.524,141.859 r0.254
  circle w0.61: c3.048,141.859 r0.254
  circle w0.61: c6.096,146.431 r0.254
  circle w0.61: c4.572,146.431 r0.254
  circle w0.61: c4.572,144.907 r0.254
  circle w0.61: c6.096,144.907 r0.254
  circle w0.61: c6.096,149.479 r0.254
  circle w0.61: c4.572,149.479 r0.254
  circle w0.61: c4.572,147.955 r0.254
  circle w0.61: c6.096,147.955 r0.254
  circle w0.61: c6.096,143.383 r0.254
  circle w0.61: c4.572,143.383 r0.254
  circle w0.61: c4.572,141.859 r0.254
  circle w0.61: c6.096,141.859 r0.254
  circle w0.61: c148.082,16.129 r0.254
  circle w0.61: c149.606,16.129 r0.254
  circle w0.61: c149.606,17.653 r0.254
  circle w0.61: c148.082,17.653 r0.254
  circle w0.61: c148.082,13.081 r0.254
  circle w0.61: c149.606,13.081 r0.254
  circle w0.61: c149.606,14.605 r0.254
  circle w0.61: c148.082,14.605 r0.254
  circle w0.61: c148.082,19.177 r0.254
  circle w0.61: c149.606,19.177 r0.254
  circle w0.61: c149.606,20.701 r0.254
  circle w0.61: c148.082,20.701 r0.254
  circle w0.61: c145.034,16.129 r0.254
  circle w0.61: c146.558,16.129 r0.254
  circle w0.61: c146.558,17.653 r0.254
  circle w0.61: c145.034,17.653 r0.254
  circle w0.61: c145.034,13.081 r0.254
  circle w0.61: c146.558,13.081 r0.254
  circle w0.61: c146.558,14.605 r0.254
  circle w0.61: c145.034,14.605 r0.254
  circle w0.61: c145.034,19.177 r0.254
  circle w0.61: c146.558,19.177 r0.254
  circle w0.61: c146.558,20.701 r0.254
  circle w0.61: c145.034,20.701 r0.254
  lines w0.508: 8.89,13.97 8.89,16.51 ; 8.89,38.735 8.89,41.275 ; 8.89,63.5 8.89,66.04 ; 8.89,96.52 8.89,99.06 ; 8.89,121.285 8.89,123.825 ; 8.89,146.05 8.89,148.59 ; 11.43,13.97 11.43,16.51 ; 11.43,38.735 11.43,41.275 ; 11.43,63.5 11.43,66.04 ; 11.43,96.52 11.43,99.06 ; 11.43,121.285 11.43,123.825 ; 11.43,146.05 11.43,148.59 ; 30.48,80.01 33.02,80.01 ; 30.48,82.55 33.02,82.55 ; 71.12,80.01 73.66,80.01 ; 71.12,82.55 73.66,82.55 ; 114.3,80.01 116.84,80.01 ; 114.3,82.55 116.84,82.55 ; 140.97,12.446 140.97,14.986 ; 140.97,38.735 140.97,41.275 ; 140.97,65.024 140.97,67.564 ; 140.97,94.996 140.97,97.536 ; 140.97,121.285 140.97,123.825 ; 140.97,147.574 140.97,150.114 ; 143.51,12.446 143.51,14.986 ; 143.51,38.735 143.51,41.275 ; 143.51,65.024 143.51,67.564 ; 143.51,94.996 143.51,97.536 ; 143.51,121.285 143.51,123.825 ; 143.51,147.574 143.51,150.114
Mechanical 1:
  drawing of 310 lines, arcs and shapes, not listed